# EAGLE board BSPD (EAGLE 8.4.1)
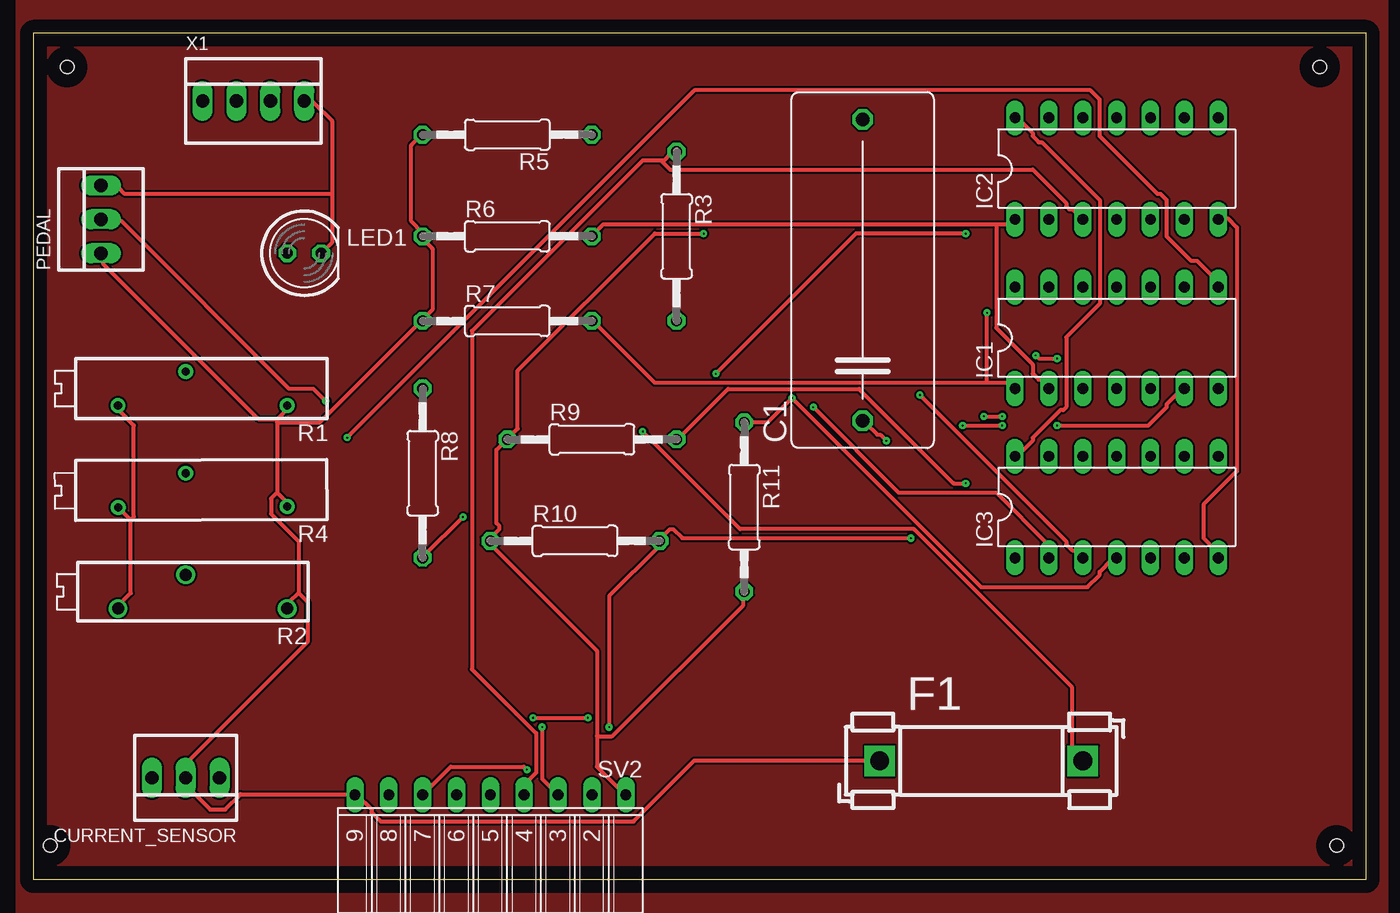
[diagram p0: board, top side]
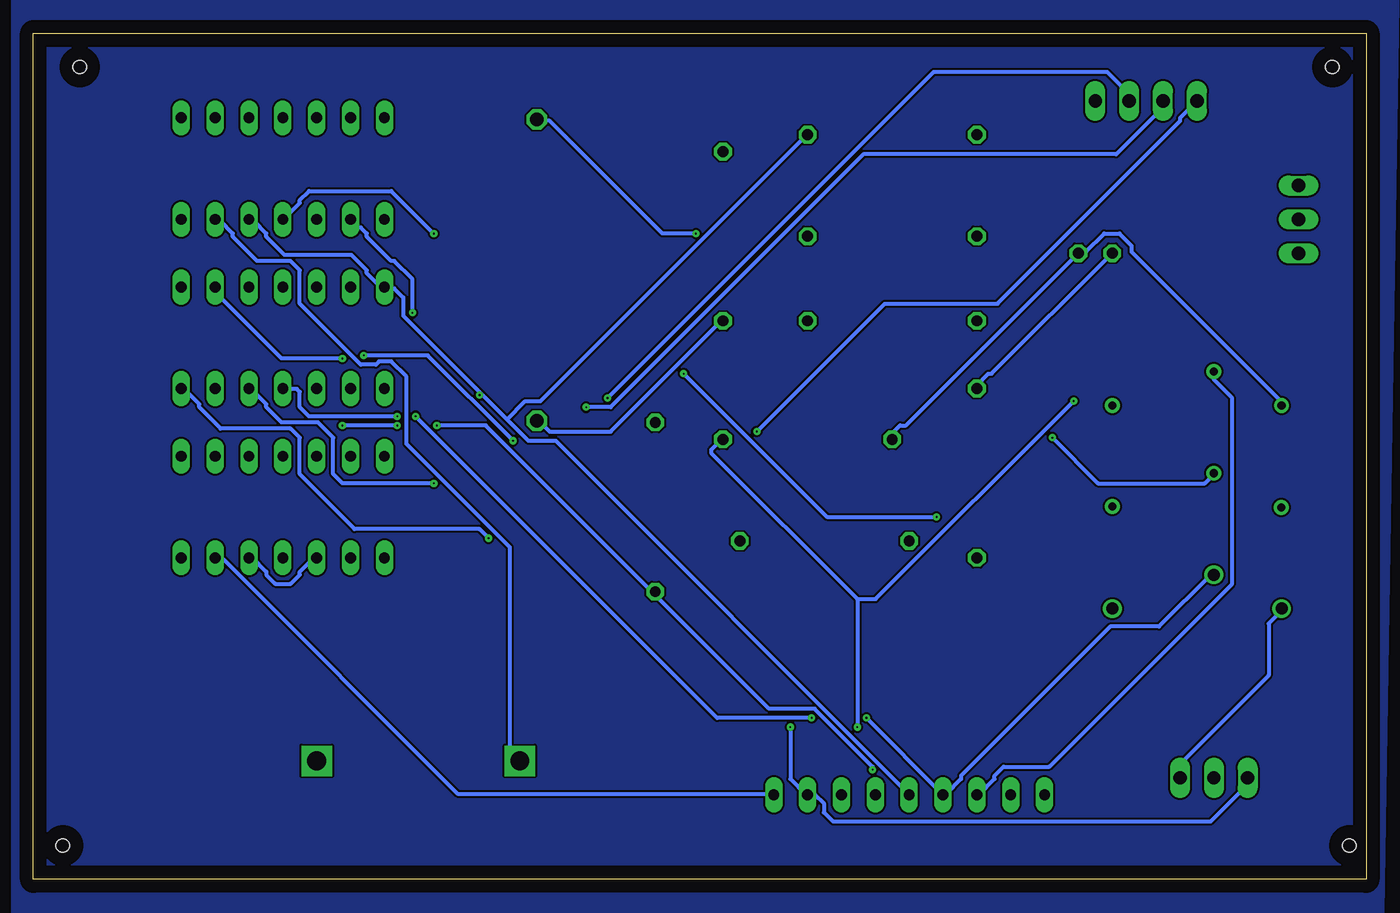
[diagram p1: board, bottom side, seen from below]

Size 100 x 63.49 mm. Coordinates in mm from the lower left corner, seen from the top.
Outline: 0,0 100,0 100,63.49 0,63.49 0,0
Copper layers (1*16): Top 0.035mm / dielectric 1.5mm / Bottom 0.035mm
Design rules "default *": minimum track width 12mil, minimum drill 5mil, track to track 6mil, track to pad 6mil, pad to pad 6mil, via to via 6mil, smd to smd 6mil, copper to edge 40mil, drill to drill 6mil, minimum pad ring 10mil, minimum via ring 8mil, stop-mask expansion 4mil, vias tented up to drill 0mil, thermal gap 10mil
Holes 1 mm at 2.54,60.96 96.52,60.96 97.79,2.54 1.27,2.54

## Footprints (pad centres in the part's own frame; a part is rotated, then mirrored left to right if it is on the bottom)
C225-108X268 = drill 1.016 octagon: 1 -11.303,0; 2 11.303,0
22-23-2031 = drill 1 long: 1 -2.54,0; 2 0,0; 3 2.54,0
FUSE_HOLDER_5X20MM = drill 1.422 pad 2.286 square: 1 0,0; 2 15.24,0
DIL14 = drill 0.813 long: 1 -7.62,-3.81; 2 -5.08,-3.81; 3 -2.54,-3.81; 4 0,-3.81; 5 2.54,-3.81; 6 5.08,-3.81; 7 7.62,-3.81; 8 7.62,3.81; 9 5.08,3.81; 10 2.54,3.81; 11 0,3.81; 12 -2.54,3.81; 13 -5.08,3.81; 14 -7.62,3.81
LED5MM = drill 0.813 octagon: A -1.27,0; K 1.27,0
RTRIM3006P = drill 0.61: 1 -7.62,1.27; 2 0,-1.27; 3 5.08,1.27
RTRIM43P = drill 0.9: 1 -7.62,1.27; 2 0,-1.27; 3 5.08,1.27
0207/12 = drill 0.813 octagon: 1 -6.35,0; 2 6.35,0
FE09W = drill 0.813 long: 1 -10.16,0; 2 -7.62,0; 3 -5.08,0; 4 -2.54,0; 5 0,0; 6 2.54,0; 7 5.08,0; 8 7.62,0; 9 10.16,0
22-23-2041 = drill 1 long: 1 -3.81,0; 2 -1.27,0; 3 1.27,0; 4 3.81,0

## Placement (x,y rotation side)
C1  330u  [C225-108X268]  62.23,45.72 90 top
CURRENT_SENSOR  22-23-2031  [22-23-2031]  11.43,7.62 180 top
F1  FUSEBLANK_5X20MM  [FUSE_HOLDER_5X20MM]  63.5,8.89 0 top
IC1  TLC339P  [DIL14]  81.28,40.64 0 top
IC2  4081N  [DIL14]  81.28,53.34 0 top
IC3  4013N  [DIL14]  81.28,27.94 0 top
LED1  [LED5MM]  20.32,46.99 0 top
PEDAL  22-23-2031  [22-23-2031]  5.08,49.53 90 top
R1  [RTRIM3006P]  11.43,36.83 180 top
R2  [RTRIM43P]  11.43,21.59 180 top
R3  1k  [0207/12]  48.26,48.26 270 top
R4  [RTRIM3006P]  11.43,29.21 180.3 top
R5  30k  [0207/12]  35.56,55.88 180 top
R6  30k  [0207/12]  35.56,48.26 0 top
R7  30k  [0207/12]  35.56,41.91 0 top
R8  220  [0207/12]  29.21,30.48 270 top
R9  30k  [0207/12]  41.91,33.02 0 top
R10  30k  [0207/12]  40.64,25.4 0 top
R11  30k  [0207/12]  53.34,27.94 270 top
SV2  [FE09W]  34.29,6.35 180 top
X1  22-23-2041  [22-23-2041]  16.51,58.42 0 top

## Library data of the parts
C1 = rcl; SPICEPREFIX: C
CURRENT_SENSOR PEDAL = con-molex; MF: MOLEX; MPN: 22-23-2031; OC_FARNELL: 1462950; OC_NEWARK: 30C0862
F1 = fuse; OC_FARNELL: unknown; OC_NEWARK: unknown
IC1 = linear
IC2 IC3 = 40xx
LED1 = led
R1 R2 R4 = rcl; SPICEMODEL: X; SPICEPREFIXL: POT
R3 R5-R11 = rcl; SPICEPREFIX: R
SV2 = con-lsta; OC_FARNELL: unknown; OC_NEWARK: unknown
X1 = con-molex; MF: MOLEX; MPN: 22-23-2041; OC_FARNELL: 1462920; OC_NEWARK: 38C0355

## Nets
BSE: IC1.5 PEDAL.2 R9.2 SV2.3
BSE_POT: IC1.4 R2.2 SV2.6
CURRENT_POT: IC1.6 R1.2 SV2.7
CURRENT_SENSOR: CURRENT_SENSOR.3 IC1.7 R10.2 SV2.2
ERROR_1: IC2.3 R3.1 SV2.4
ERROR_2: IC1.14 IC2.5 IC3.3 IC3.5 R5.1 SV2.5
GND: C1.2 CURRENT_SENSOR.1 IC3.6 LED1.K PEDAL.3 R1.3 R2.3 R4.3 R9.1 R10.1 R11.2 SV2.1 X1.4
N$1: IC1.2 IC2.1 R6.2
N$2: IC1.1 IC2.2 R7.2
N$3: IC3.2 X1.2
N$4: F1.2 X1.1
N$6: C1.1 IC1.9 R3.2
N$16: IC2.4 R8.2
N$17: LED1.A R8.1
RST: IC3.4 R11.1 X1.3
TIME_POT: SV2.8
TIMED_POT: IC1.8 R4.2
V+: IC1.3
V-: IC1.12
VCC: CURRENT_SENSOR.2 F1.1 IC2.6 PEDAL.1 R1.1 R2.1 R4.1 R5.2 R6.1 R7.1 SV2.9
VDD: IC2.14 IC3.14
VSS: IC2.7 IC3.7

## Tracks (layer width: path | path; a pad name or v marks a point on that pad's centre or on a via)
BSE  (via drill 0.13)
  Top 0.305: SV2.3 38.18,7.54 v38.18,11.43 | v69.95,29.72 69.04,29.72 61.95,36.8 52.12,36.8 48.69,33.38 48.46,33.38 48.23,33.15 R9.2 | v21.95,35.89 21.03,36.8 19.2,36.8 6.63,49.38 5.26,49.38 PEDAL.2
  Bottom 0.305: 38.18,21.03 v38.18,11.43 | 38.18,21.03 49.15,32 49.15,32.23 48.69,32.69 48.46,32.69 48.23,32.92 R9.2 | v69.95,29.72 76.81,29.72 77.5,30.4 77.5,33.15 78.64,34.29 81.38,34.29 82.53,35.43 82.53,35.66 83.67,36.8 IC1.5 | v21.95,35.89 36.8,21.03 38.18,21.03
BSE_POT  (via drill 0.13)
  Top 0.305: v71.32,34.75 v72.69,34.75 | v37.49,12.12 v41.6,12.12
  Bottom 0.305: R2.2 11.66,22.86 15.54,18.97 19.2,18.97 30.4,7.77 30.4,7.54 31.55,6.4 SV2.6 31.77,6.4 v37.49,12.12 | v72.69,34.75 79.32,34.75 80.01,35.43 80.01,36.58 80.24,36.8 81.15,36.8 IC1.4 | v71.32,34.75 48.69,12.12 v41.6,12.12
CURRENT_POT  (via drill 0.13)
  Top 0.305: v76.81,34.06 83.67,34.06 85.04,35.43 85.04,35.66 86.18,36.8 IC1.6 | v69.72,34.06 v72.69,34.06 | v37.03,8.23 36.8,8.46 31.32,8.46 SV2.7
  Bottom 0.305: R1.2 11.43,37.49 10.06,36.12 10.06,22.17 23.77,8.46 27.2,8.46 27.89,7.77 27.89,7.54 29.03,6.4 SV2.7 | v72.69,34.06 v76.81,34.06 | v69.72,34.06 66.06,34.06 44.81,12.8 41.38,12.8 37.03,8.46 v37.03,8.23
CURRENT_SENSOR  (via drill 0.13)
  Top 0.305: v43.2,11.43 43.2,21.26 46.86,24.92 46.86,25.38 R10.2 46.86,25.6 47.09,25.83 47.32,25.83 47.78,26.29 48.01,26.29 48.69,25.6 v65.84,25.6
  Bottom 0.305: v43.2,11.43 43.2,7.54 42.06,6.4 SV2.2 41.83,6.4 41.38,6.4 40.69,5.71 40.69,5.03 40.01,4.34 11.66,4.34 8.91,7.09 8.91,7.54 CURRENT_SENSOR.3 | v65.84,25.6 66.52,26.29 75.89,26.29 80.01,30.4 80.01,33.15 80.7,33.83 85.95,33.83 87.55,35.43 87.55,35.66 88.7,36.8 IC1.7
ERROR_1
  Top 0.305: 47.09,53.95 47.32,53.95 47.78,54.41 48.23,54.41 R3.1 | 47.09,53.95 45.72,53.95 32.92,41.15 32.92,15.77 37.72,10.97 37.72,8 37.03,7.32 37.03,6.4 SV2.4 | 47.09,53.95 47.78,53.26 74.98,53.26 77.5,50.75 77.5,50.52 77.72,50.29 77.95,50.29 78.64,49.61 IC2.3
ERROR_2  (via drill 0.13)
  Top 0.305: IC3.3 78.18,24.69 77.95,24.69 77.5,25.15 77.5,25.38 v66.52,36.35
  Bottom 0.305: IC3.3 78.87,24 79.1,24 80.01,23.09 80.01,22.86 80.7,22.17 81.84,22.17 82.53,22.86 82.53,23.09 83.67,24.23 IC3.5 | 66.29,36.35 72.24,42.29 72.24,43.66 72.92,44.35 73.61,44.35 IC1.14 73.84,44.35 74.98,45.49 74.98,45.72 76.12,46.86 81.15,46.86 82.53,48.23 82.53,48.46 83.44,49.38 83.67,49.38 IC2.5 | 66.29,36.35 64.47,34.52 | 64.47,34.52 62.87,32.92 60.81,32.92 34.29,6.4 SV2.5 | 64.47,34.52 63.09,35.89 61.95,35.89 42.06,55.78 R5.1 | 66.29,36.35 v66.52,36.35
GND  (via drill 0.13)
  Top 0.305: 7.32,26.98 6.4,27.89 R4.3 | 7.32,26.98 7.32,21.49 6.17,20.34 R2.3 | 7.32,26.98 7.54,27.2 7.54,34.06 6.4,35.2 6.4,35.43 R1.3 | 22.4,51.44 22.4,56.92 21.03,58.29 20.34,58.29 X1.4 | 22.4,51.44 22.4,47.78 21.72,47.09 LED1.K | 22.4,51.44 6.86,51.44 6.4,51.89 5.26,51.89 PEDAL.3 | 42.29,10.74 42.29,17.14 34.29,25.15 R10.1 34.29,25.6 34.98,26.29 34.98,26.52 34.75,26.75 34.75,32.23 35.43,32.92 R9.1 35.66,33.15 36.35,33.83 36.35,38.18 46.63,48.46 v50.29,48.46 | 42.29,10.74 42.29,8.46 44.35,6.4 SV2.1 | 42.29,10.74 43.43,10.74 53.26,20.57 53.26,21.49 R11.2
  Bottom 0.305: CURRENT_SENSOR.1 13.95,7.77 13.95,8.69 7.32,15.32 7.32,19.2 6.4,20.12 R2.3 | v50.29,48.46 52.81,48.46 61.27,56.92 62.18,56.92 C1.2 | R9.1 35.43,33.15 35.43,33.6 34.98,34.06 34.52,34.06 LED1.K 21.49,47.09 21.03,47.09 19.66,48.46 18.52,48.46 17.6,47.55 17.6,47.09 6.4,35.89 6.4,35.66 R1.3 | IC3.6 86.18,24 85.72,24 68.12,6.4 44.58,6.4 SV2.1
N$1
  Top 0.305: 72.24,49.15 73.38,49.15 73.61,49.38 IC2.1 | 72.24,49.15 42.75,49.15 42.06,48.46 R6.2 | 72.24,49.15 72.24,41.38 74.98,38.63 74.98,37.95 75.44,37.49 75.67,37.49 76.12,37.03 IC1.2
N$2  (via drill 0.13)
  Top 0.305: 71.55,37.26 73.38,37.26 73.61,37.03 IC1.1 | 71.55,37.26 46.63,37.26 42.06,41.83 R7.2 | 71.55,37.26 v71.55,42.52
  Bottom 0.305: v71.55,42.52 71.55,45.03 72.92,46.41 73.15,46.41 74.98,48.23 74.98,48.46 75.44,48.92 75.67,48.92 76.12,49.38 IC2.2
N$3  (via drill 0.13)
  Top 0.305: v58.52,35.43 64.92,29.03 72.24,29.03 76.12,25.15 76.12,24.23 IC3.2
  Bottom 0.305: v58.52,35.43 56.69,35.43 37.72,54.41 18.75,54.41 15.32,57.84 15.32,58.29 X1.2
N$4  (via drill 0.13)
  Top 0.305: v45.72,33.6 53.03,26.29 66.06,26.29 77.95,14.4 77.95,9.6 78.64,8.91 F1.2
  Bottom 0.305: v45.72,33.6 36.12,43.2 27.66,43.2 13.95,56.92 13.95,57.15 12.8,58.29 X1.1
N$6  (via drill 0.13)
  Top 0.305: v76.81,39.09 75.44,39.09 v75.21,39.32 | v64.01,32.92 63.55,33.38 63.32,33.38 62.41,34.29 C1.1
  Bottom 0.305: R3.2 48.46,41.83 56.69,33.6 61.27,33.6 62.18,34.52 C1.1 | v76.81,39.09 81.38,39.09 86.18,43.89 86.18,44.35 IC1.9 | v75.21,39.32 70.41,39.32 v64.01,32.92
N$12
  pour Top: -1.27,74.93 -1.27,-2.54 101.6,-2.54 101.6,76.2
N$14
  pour Bottom: -2.54,74.93 -1.27,-2.54 101.6,-2.54 101.6,76.2
N$16  (via drill 0.13)
  Top 0.305: v32.23,27.2 29.26,24.23 R8.2 | v51.21,37.95 61.72,48.46 v69.95,48.46
  Bottom 0.305: v32.23,27.2 40.46,27.2 v51.21,37.95 | v69.95,48.46 73.15,51.66 79.32,51.66 80.01,50.98 80.01,50.75 81.15,49.61 IC2.4
N$17
  Bottom 0.305: LED1.A 19.2,46.86 28.12,37.95 28.35,37.95 29.26,37.03 R8.1
RST  (via drill 0.13)
  Top 0.305: IC3.4 81.15,24 80.92,24 80.01,23.09 80.01,22.86 79.1,21.95 71.09,21.95 v56.92,36.12 55.09,34.29 R11.1
  Bottom 0.305: v56.92,36.12 32.46,60.58 19.43,60.58 17.83,58.98 17.83,58.52 X1.3
TIMED_POT  (via drill 0.13)
  Top 0.305: v23.55,33.15 49.61,59.21 79.32,59.21 80.01,58.52 80.01,55.78 84.35,51.44 84.58,51.44 85.04,50.98 85.04,48.23 86.87,46.41 87.33,46.41 88.7,45.03 88.7,44.58 IC1.8
  Bottom 0.305: v23.55,33.15 20.12,29.72 12.12,29.72 11.43,30.4 R4.2
VCC
  Top 0.305: R5.2 29.03,55.78 28.35,55.09 28.35,49.38 29.26,48.46 R6.1 29.03,48.23 29.95,47.32 29.95,42.75 29.26,42.06 R7.1 29.03,41.83 21.49,34.29 18.29,34.29 | 18.29,29.03 18.97,28.35 18.97,28.12 R4.1 | 18.29,34.52 18.29,34.29 | 18.29,34.29 18.29,29.03 | 18.29,34.52 19.2,35.43 R1.1 | 19.89,21.49 19.2,20.8 19.2,20.34 R2.1 | 19.89,21.49 19.89,25.38 17.83,27.43 17.83,28.57 18.29,29.03 | 18.29,34.52 16.92,34.52 5.26,46.18 5.26,46.86 PEDAL.1 | 19.89,21.49 20.57,20.8 20.57,17.83 11.43,8.69 CURRENT_SENSOR.2 11.43,7.09 13.26,5.26 14.4,5.26 15.54,6.4 24,6.4 SV2.9 24.23,6.4 25.38,5.26 25.38,5.03 26.06,4.34 45.03,4.34 49.61,8.91 63.32,8.91 F1.1
  Bottom 0.305: IC2.6 86.18,49.38 85.95,49.38 85.04,48.46 85.04,48.23 83.21,46.41 80.7,46.41 80.01,45.72 80.01,43.2 75.44,38.63 74.3,38.63 74.07,38.86 73.15,38.86 72.01,37.72 72.01,32.69 64.24,24.92 64.24,9.6 63.55,8.91 F1.1
VDD
  Top 0.305: IC3.14 73.84,31.77 74.98,32.92 74.98,33.15 77.04,35.2 77.27,35.2 77.5,35.43 77.5,40.69 80.01,43.2 80.01,50.98 75.67,55.32 75.44,55.32 74.98,55.78 74.98,56.01 73.84,57.15 IC2.14
VSS
  Top 0.305: IC3.7 88.7,24.23 88.7,24.69 87.78,25.6 87.78,28.12 90.3,30.63 90.3,48.92 89.61,49.61 88.92,49.61 IC2.7

## Text on the board
tDocu: Comparator Resistor | Power Resistor | Pedal Resistor | TIME_POT | CURR_POT | BSE_POT | ERROR_2 | ERROR_1 | BSE | CURR_SENSE | Vcc | GND